# Altium PCB ADS805.PcbDoc
Units mm, origin at the board's own origin, x right, y up, seen from the top; angles counter-clockwise.
Board outline 78.23 x 53.34 mm, 2 copper layers (Top Layer, Bottom Layer); 53 components, 42 nets, 202 pads, 51 vias.
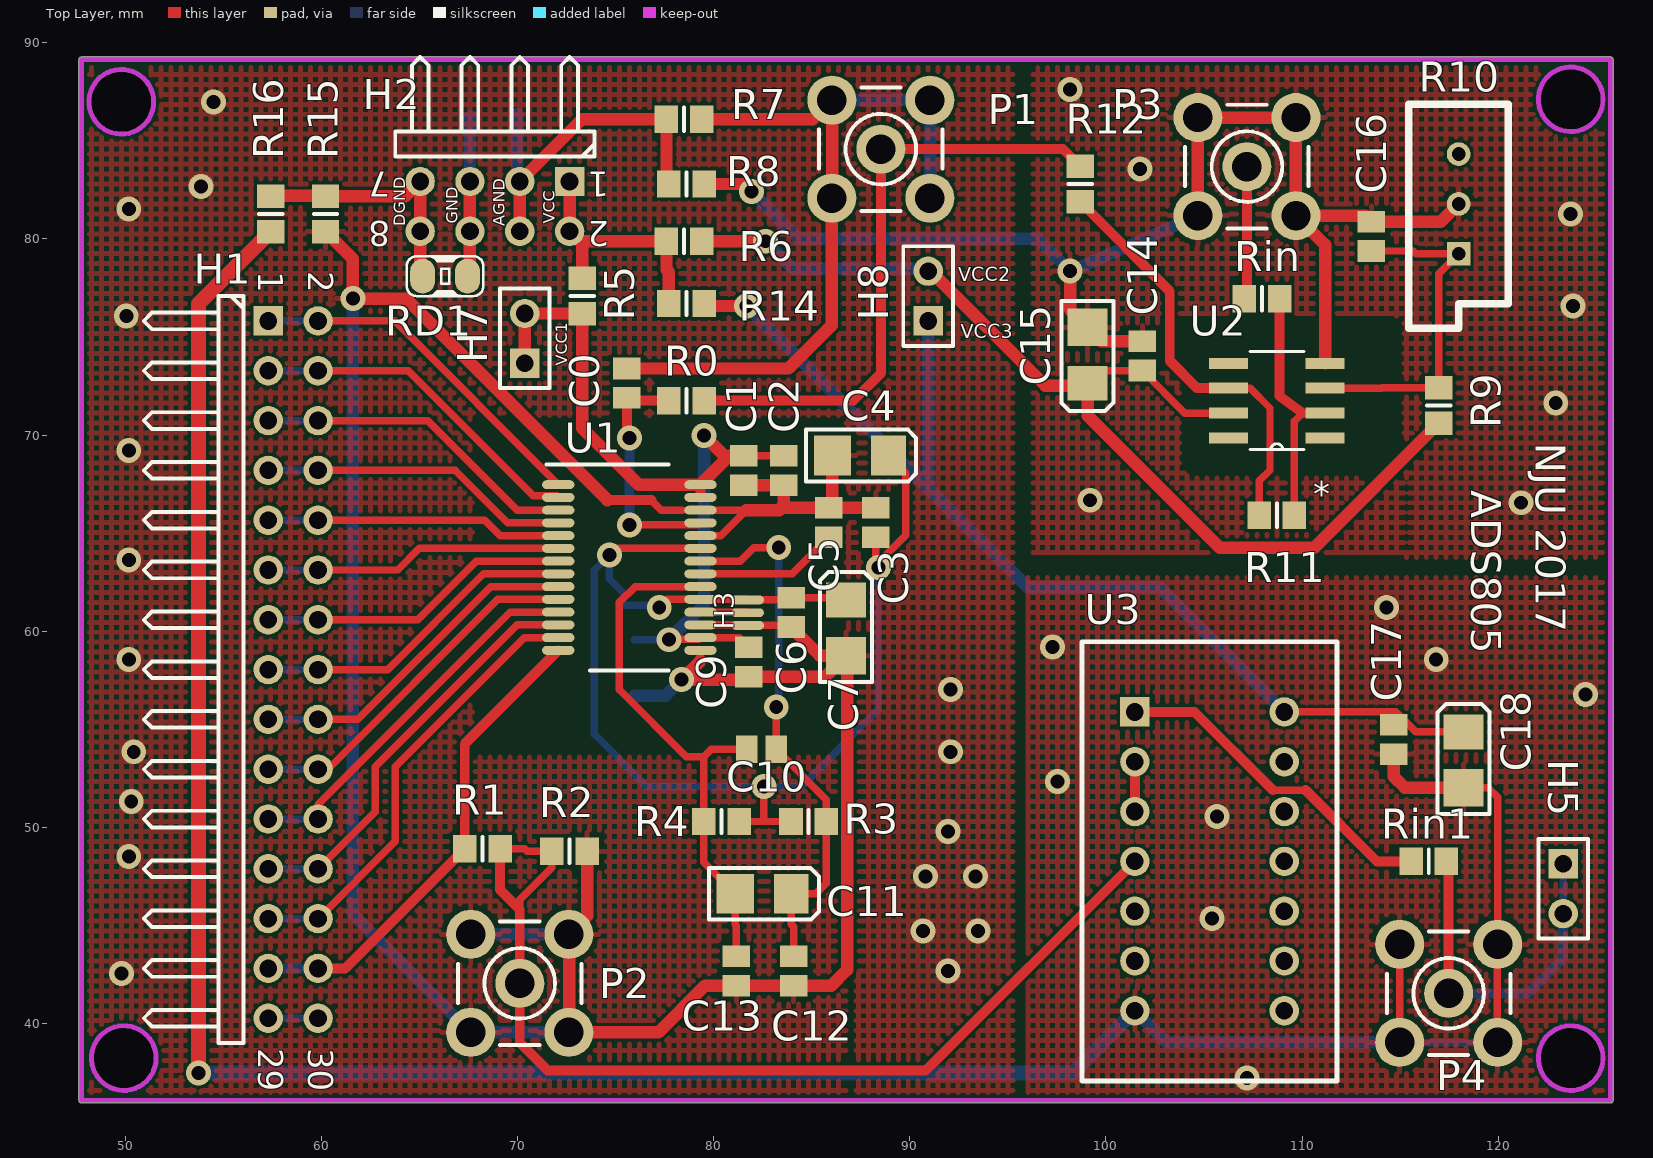
[diagram p0: Top Layer view]
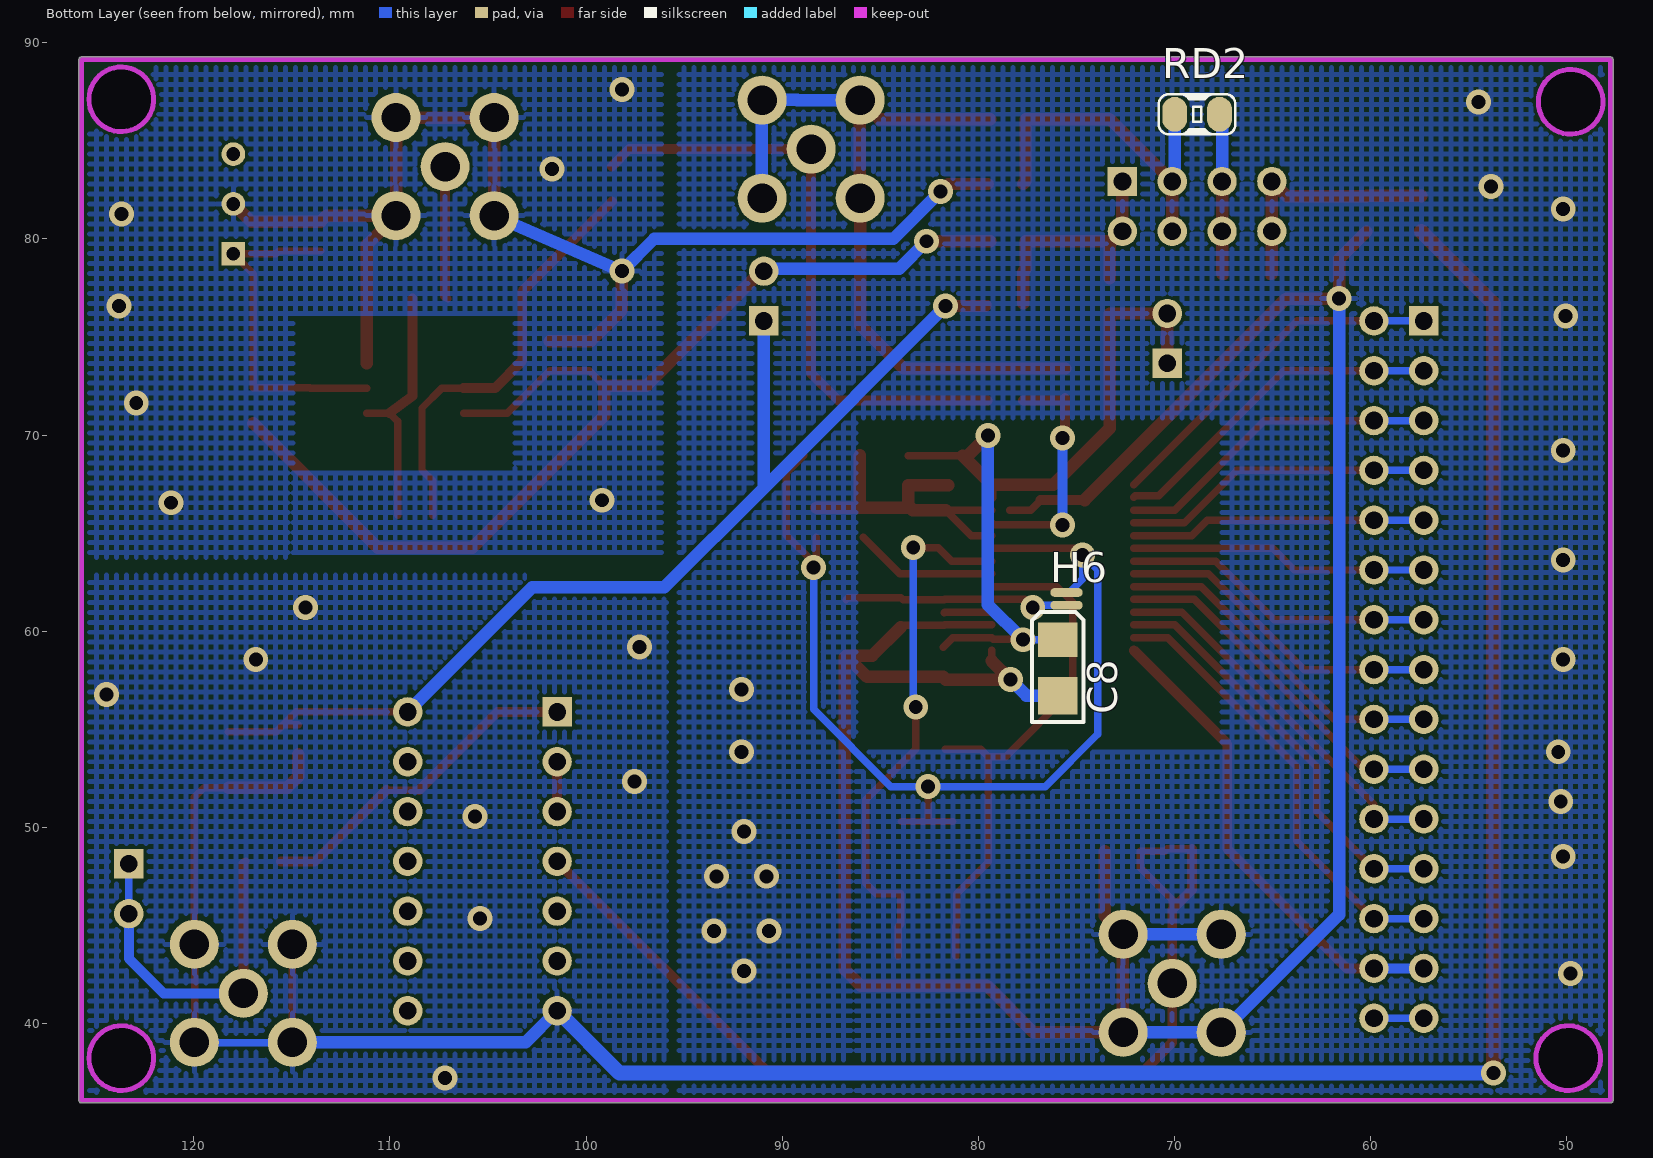
[diagram p1: Bottom Layer view, seen from below]

## Layer stack, top to bottom
Top Solder: solder mask 0.0102, Solder Resist, Dk 3.5
Top Layer: signal copper 0.0356
Dielectric 1: dielectric 0.32, FR-4, Dk 4.8
Bottom Layer: signal copper 0.0356
Bottom Solder: solder mask 0.0102, Solder Resist, Dk 3.5

## Board outline
47.625,36.068 47.625,89.154 cw(c47.752,89.154) 47.752,89.281 125.73,89.281 cw(c125.73,89.154) 125.857,89.154 125.857,36.068 cw(c125.73,36.068) 125.666,35.958 cw(c125.603,36.068) 125.603,35.941 47.752,35.941 cw(c47.752,36.068)

## Design rules (kind name [scope] priority, off if disabled: settings)
Clearance Clearance_1 [All] p1: gap=0.15
Clearance [All] p2: gap=0.254
PolygonConnect [All] p1: connectstyle=Relief reliefconductorwidth=0.254 reliefentries=4 polygonreliefangle="90 Angle" airgapwidth=0.254
RoutingVias [All] p1: holewidth=0.711 width=1.27 viastyle="Through Hole" minholewidth=0.711 minwidth=1.27 maxholewidth=0.711 maxwidth=1.27
SolderMaskExpansion [All] p1: expansion=0.102
Width SGND [InNet('SGND')] p1: maxlimit=1.016 minlimit=0.254 preferedwidth=0.635 minimp=50.000000 maximp=50.000000 favimp=50.000000
Width Width_1 [InNet('NetC17_2')] p2: maxlimit=0.762 minlimit=0.254 preferedwidth=0.635 minimp=50.000000 maximp=50.000000 favimp=50.000000
Width LH [InNetClass('LH')] p3: maxlimit=0.762 minlimit=0.508 preferedwidth=0.635 minimp=50.000000 maximp=50.000000 favimp=50.000000
Width GND2 [InNet('GND2')] p4: maxlimit=0.762 minlimit=0.254 preferedwidth=0.635 minimp=50.000000 maximp=50.000000 favimp=50.000000
Width VCC [InNetClass('VCC')] p5: maxlimit=0.762 minlimit=0.381 preferedwidth=0.635 bottomlayer_minwidth=0.508 minimp=50.000000 maximp=50.000000 favimp=50.000000
Width DGND [InNetClass('DGND')] p6: maxlimit=0.762 minlimit=0.254 preferedwidth=0.635 minimp=50.000000 maximp=50.000000 favimp=50.000000
Width AGND [InNet('AGND1')] p7: maxlimit=0.762 minlimit=0.508 preferedwidth=0.635 minimp=50.000000 maximp=50.000000 favimp=50.000000
Width DataBits [InNetClass('DataBits')] p8: maxlimit=0.381 minlimit=0.254 preferedwidth=0.381 minimp=50.000000 maximp=50.000000 favimp=50.000000
Width [All] p9: maxlimit=0.635 minlimit=0.254 preferedwidth=0.381 minimp=50.000000 maximp=50.000000 favimp=50.000000
30 further rules are at their usual default settings.

## Classes and differential pairs
net class DGND: DGND1
component class ADS803_schematic: C0 C1 C2 C3 C4 C5 C6 C7 C8 C9 C10 C11 C12 C13 C14 C15 C16 C17 C18 H1 H2 H3 P1 P2 P3 P4 R0 R1 R2 R3 R4 R5 R6 R7 R8 R9 R10 R11 R12 R14 R15 R16 Rin Rin1 U1 U2 U3

## Components (designator, comment, footprint, x,y, rotation, side; value= is the part's Value field where it differs from the comment)
C0 "100pF" C0805 75.565,72.644 r270 top
C1 "0.1uF" C0805 81.534,68.199 r270 top
C2 "0.1uF" C0805 83.566,68.199 r270 top
C3 "0.1uF" C0805 88.265,65.532 r90 top
C4 "10uF" CAP_SMD_3216 88.9,68.961 r180 top
C5 "0.1uF" C0805 85.852,65.532 r90 top
C6 "0.1uF" C0805 83.947,60.96 r270 top
C7 "10uF" CAP_SMD_3216 86.741,61.595 r270 top
C8 "2.2uF" CAP_SMD_3216 75.946,59.563 r270 bottom
C9 "0.1uF" C0805 81.788,58.42 r270 top
C10 "0.1uF" C0805 82.423,53.975 r180 top
C11 "10uF" CAP_SMD_3216 83.947,46.609 r180 top
C12 "0.1uF" C0805 84.074,42.672 r90 top
C13 "0.1uF" C0805 81.153,42.672 r90 top
C14 "0.1uF" C0805 101.854,74.041 r270 top
C15 "10uF" CAP_SMD_3216 99.06,72.644 r90 top
C16 "0.1uF" C0805 113.538,80.137 r270 top
C17 "0.1uF" C0805 114.681,54.483 r90 top
C18 "10uF" CAP_SMD_3216 118.237,54.864 r270 top
H1 "Header15x2" HDR2X15H 57.277,75.819 r270 top
H2 "Header4x2" HDR2X4H 72.644,82.931 r180 top
H3 "Header 3" Pin3 81.788,60.96 r0 top
H5 "Comment" HDR1X2 123.317,48.133 r270 top
H6 "Comment" Pin2 75.438,61.595 r180 bottom
H7 "Comment" HDR1X2 70.358,73.66 r90 top
H8 "Comment" HDR1X2 90.932,75.819 r90 top
P1 "SMB" SMB_V-RJ45 88.519,84.582 r0 top
P2 "SMB" SMB_V-RJ45 70.104,42.037 r0 top
P3 "SMB" SMB_V-RJ45 107.188,83.693 r0 top
P4 "SMB" SMB_V-RJ45 117.475,41.529 r0 top
R0 "25Ohm" 6-0805_N 78.613,71.755 r180 top
R1 "50Ohm" 6-0805_N 68.199,48.895 r0 top
R2 "50Ohm" 6-0805_N 72.644,48.768 r180 top
R3 "2k" 6-0805_N 84.836,50.292 r180 top
R4 "2k" 6-0805_N 80.391,50.292 r180 top
R5 "0Ohm" 6-0805_N 73.279,77.089 r270 top
R6 "0Ohm" 6-0805_N 78.486,79.883 r180 top
R7 "0Ohm" 6-0805_N 78.486,86.106 r0 top
R8 "0Ohm" 6-0805_N 78.613,82.804 r180 top
R9 "25Ohm" 6-0805_N 116.967,71.501 r90 top
R10 "Res Adj2" PRS_POT 117.983,84.328 r270 top
R11 "Res2" 6-0805_N 108.712,65.913 r180 top
R12 "Res2" 6-0805_N 98.679,82.804 r270 top
R14 "0Ohm" 6-0805_N 78.613,76.708 r0 top
R15 "0Ohm" 6-0805_N 60.198,81.28 r90 top
R16 "0Ohm" 6-0805_N 57.404,81.28 r90 top
RD1 "Comment" 0805R 65.151,78.105 r0 top
RD2 "Comment" 0805R 69.977,86.36 r180 bottom
Rin "25Ohm" 6-0805_N 107.95,76.962 r0 top
Rin1 "25Ohm" 6-0805_N 116.459,48.26 r0 top
U1 "ADS803" DB0028A_N 75.692,63.246 r0 top
U2 "OPA691_D_8" D8 108.712,71.755 r180 top
U3 "74VHC04" DIP-P14 105.283,48.26 r0 top

## Footprints (in the part's own frame and the unit in brackets; to place one, negate y for a bottom-side part, rotate by r counter-clockwise, add the part's x,y. Pads: shape width x height; smd on the part's side, far side on the other; paste and mask are expansions set on the pad)
6-0805_N [mm] "Chip Resistor, Body 2.0x1.2mm, IPC Medium Density"
  rect 1.2x1.4 smd: 1(-0.9,0) 2(0.9,0)
  silkscreen extent 0,-0.6 0,0.6, body extent -1.07,-0.7 1.07,0.7, height 0.7
0805R [mil] "0805封装电阻"
  oval 50x70 smd: 1(0,0) 2(90,0)
  silkscreen extent -32,-40 122,40, body extent 3,-25 82,25, height 30
C0805 [mm] "Chip Capacitor, Body 2.0x1.3mm, IPC High Density"
  rect 1.1x1.4 smd: 1(-0.75,0) 2(0.75,0)
  body extent -1.1,-0.72 1.1,0.72, height 1.4
CAP_SMD_3216 [mil] "贴片钽电容，10uF"
  rect 70x80 smd: 1(0,0)
  rect 75x80 smd: 2(112.2,0)
  silkscreen extent -56,-52 165,52, body extent -11,-35 123,35, height 63
D8 [mil]
  rect 78x22 smd: 1(-97,75) 2(-97,25) 3(-97,-25) 4(-97,-75) 5(97,-75) 6(97,-25) 7(97,25) 8(97,75)
  silkscreen extent -54,-98 54,98, body extent -122,-99 122,99, height 69
DB0028A_N [mm]
  oval 1.65x0.45 smd paste+0 mask+0.051: 1(-3.625,4.225) 2(-3.625,3.575) 3(-3.625,2.925) 4(-3.625,2.275) 5(-3.625,1.625) 6(-3.625,0.975) 7(-3.625,0.325) 8(-3.625,-0.325) 9(-3.625,-0.975) 10(-3.625,-1.625) 11(-3.625,-2.275) 12(-3.625,-2.925) 13(-3.625,-3.575) 14(-3.625,-4.225) 15(3.625,-4.225) 16(3.625,-3.575) 17(3.625,-2.925) 18(3.625,-2.275) 19(3.625,-1.625) 20(3.625,-0.975) 21(3.625,-0.325) 22(3.625,0.325) 23(3.625,0.975) 24(3.625,1.625) 25(3.625,2.275) 26(3.625,2.925) 27(3.625,3.575) 28(3.625,4.225)
  silkscreen extent -4.22,-5.25 2,5.25, body extent 0,0 0.25,0.25, height 0.25
DIP-P14 [mm]
  rect 1.5x1.5 hole 0.9: 1(-3.81,7.62)
  round 1.5 hole 0.9: 2(-3.81,5.08) 3(-3.81,2.54) 4(-3.81,0) 5(-3.81,-2.54) 6(-3.81,-5.08) 7(-3.81,-7.62) 8(3.81,-7.62) 9(3.81,-5.08) 10(3.81,-2.54) 11(3.81,0) 12(3.81,2.54) 13(3.81,5.08) 14(3.81,7.62)
  silkscreen extent -6.5,-11.2 6.5,11.2
HDR1X2 [mm] "Connector; Header; 2 Position"
  rect 1.5x1.5 hole 0.9: 1(0,0)
  round 1.5 hole 0.9: 2(2.54,0)
  silkscreen extent -1.27,-1.27 3.81,1.27
HDR2X4H [mm] "Connector; Header; 4x2 Position; Right Angle"
  rect 1.5x1.5 hole 0.9: 1(0,0)
  round 1.5 hole 0.9: 2(0,2.54) 3(2.54,0) 4(2.54,2.54) 5(5.08,0) 6(5.08,2.54) 7(7.62,0) 8(7.62,2.54)
  silkscreen extent -1.27,-6.35 8.89,-1.27
HDR2X15H [mm] "Connector; Header; 15x2 Position; Right Angle"
  rect 1.5x1.5 hole 0.9: 1(0,0)
  round 1.5 hole 0.9: 2(0,2.54) 3(2.54,0) 4(2.54,2.54) 5(5.08,0) 6(5.08,2.54) 7(7.62,0) 8(7.62,2.54) 9(10.16,0) 10(10.16,2.54) 11(12.7,0) 12(12.7,2.54) 13(15.24,0) 14(15.24,2.54) 15(17.78,0) 16(17.78,2.54) 17(20.32,0) 18(20.32,2.54) 19(22.86,0) 20(22.86,2.54) 21(25.4,0) 22(25.4,2.54) 23(27.94,0) 24(27.94,2.54) 25(30.48,0) 26(30.48,2.54) 27(33.02,0) 28(33.02,2.54) 29(35.56,0) 30(35.56,2.54)
  silkscreen extent -1.27,-6.35 36.83,-1.27
Pin2 [mm]
  oval 1.65x0.45 smd paste+0 mask+0.051: 1(-0.058,0.377) 2(-0.058,-0.273)
Pin3 [mm]
  oval 1.65x0.45 smd paste+0 mask+0.051: 1(-0.058,0.631) 2(-0.058,-0.019) 3(-0.058,-0.669)
PRS_POT [mm] "电位器"
  rect 1.2x1.2 hole 0.7: 1(5.08,0)
  round 1.2 hole 0.7: 2(2.54,0) 3(0,0)
  silkscreen extent -2.54,-2.54 8.89,2.54, body extent -2.64,-2.64 7.52,2.64, height 10.5
SMB_V-RJ45 [mm] "Connector; SMB Straight"
  round 2.5 hole 1.5: 1(0,0) 2(-2.5,-2.5) 2(-2.5,2.5) 2(2.5,-2.5) 2(2.5,2.5)
  silkscreen extent -3.15,-3.15 3.15,3.15

## Part data
C0 C1 C2 C3 C5 C6 C9 C10 C12 C13 C14 C16 C17: library part Cap1
C4 C7 C8 C11 C15 C18: library part Cap2
H3: "Header, 3-Pin"
P1 P2 P3 P4: "SMB Straight Connector"
R0 R1 R2 R3 R4 R5 R6 R7 R8 R9 R14 R15 R16 Rin Rin1: library part RES1
R10: "Variable Resistor"
R11 R12: "Resistor"
U2: "Imported"
U3: "非门"

## Free pads (board coordinates)
  round 1.524 hole 3.1: 4(49.784,86.995) 5(123.698,87.122) 6(123.698,38.227) 7(49.911,38.227)

## Via types
v1: diameter 1.27, hole 0.711, Top Layer to Bottom Layer, 51 vias

## Nets (pads, with @x,y where several pads share a name; then routed paths per layer and width w, separated by ;. In a path a pad name is that pad's centre, name@x,y a point inside that pad or via, vN(x,y) a via of type N, cw(c..) or ccw(c..) an arc to the next point about the centre after c; other vN are vias at no path point)
ADIN: P1.1 R0.1 R12.1 | length 31.5
  Top Layer w0.508: R0.1 87.122,71.755 88.519,73.152 P1.1 97.801,84.582 R12.1
AGND1: C0.1 P1.2 R7.2 | length 39.9
  Top Layer w0.635: C0.1 83.808,73.394 86.019,75.605 86.019,82.082 86.03,82.093 86.03,87.071 86.019,87.082 85.043,86.106 R7.2
  Bottom Layer w0.635: P1.2@86.019,87.082 89.216,87.082 89.23,87.097 91.004,87.097 91.019,87.082 91.034,87.067 91.034,82.097 P1.2@91.019,82.082
CLK1: P2.1 R1.2 R2.2 U3.4 | length 53
  Top Layer w0.381: R1.2 70.358,48.895 70.485,48.768 R2.2 71.744,47.944 70.104,46.304 70.104,45.807
  Top Layer w0.508: R1.2 69.099,46.812 70.104,45.807 P2.1 70.104,39.014 71.526,37.592 90.805,37.592 U3.4
DGND1: C17.1 C18.2 P4.2 R16.1 U3.7 | length 137.1
  Top Layer w0.381: P4.2@114.975,39.029 114.986,39.04 114.986,44.018 P4.2@114.975,44.029 ; C18.2 119.482,52.014 119.975,51.521 119.975,44.029 119.964,44.018 119.964,39.04 P4.2@119.975,39.029
  Top Layer w0.635: C17.1 114.681,52.573 115.24,52.014 C18.2
  Top Layer w0.762: v1(53.721,37.465) 53.721,76.697 R16.1
  Bottom Layer w0.381: P4.2@114.975,39.029 114.99,39.014 119.96,39.014 P4.2@119.975,39.029
  Bottom Layer w0.635: U3.7 103.084,39.029 P4.2@114.975,39.029
  Bottom Layer w0.762: v1(53.721,37.465) 98.298,37.465 U3.7
  other v1: 107.188,37.211 105.41,45.339 105.664,50.546 97.536,52.324 124.46,56.769 116.84,58.547 97.282,59.182 114.3,61.214
GND: H2.5 H2.6 RD1.2 RD2.2 | length 8.4
  Top Layer w0.381: RD1.2 RD1.2@67.564,78.232
  Top Layer w0.635: RD1.2@67.564,78.232 H2.6 H2.5
  Bottom Layer w0.381: RD2.2@67.564,86.233 RD2.2
  Bottom Layer w0.635: H2.5 RD2.2@67.564,86.233
GND2: C14.1 C15.2 C16.1 P3.2 R8.1 R10.2 U2.4 | length 65.9
  Top Layer w0.635: R8.1 81.534,82.804 v1(81.915,82.423) ; v1(98.171,78.359) 98.171,76.383 C15.2 99.763,74.791 C14.1 ; P3.2@104.688,81.193 104.688,86.193 109.688,86.193 P3.2@109.688,81.193 ; U2.4 111.176,79.705 P3.2@109.688,81.193 ; R10.2 117.082,80.887 C16.1 113.232,81.193 P3.2@109.688,81.193
  Bottom Layer w0.635: v1(81.915,82.423) 84.328,80.01 96.52,80.01 v1(98.171,78.359) P3.2@104.688,81.193
  other v1: 121.158,66.548 99.187,66.675 122.936,71.628 123.825,76.581 123.698,81.28 101.727,83.566 98.171,87.63
L1: H1.1 H1.2 U1.1 | length 18.2
  Top Layer w0.381: H1.2 63.719,75.819 U1.1
  Bottom Layer w0.381: H1.1 H1.2
L2: H1.3 H1.4 U1.2 | length 17.5
  Top Layer w0.381: H1.4 64.421,73.279 70.795,66.905 71.983,66.905 U1.2
  Bottom Layer w0.381: H1.3 H1.4
L3: H1.5 H1.6 U1.3 | length 16.7
  Top Layer w0.381: H1.6 65.405,70.739 69.973,66.171 U1.3
  Bottom Layer w0.381: H1.5 H1.6
L4: H1.7 H1.8 U1.4 | length 15.9
  Top Layer w0.381: H1.8 66.802,68.199 69.48,65.521 U1.4
  Bottom Layer w0.381: H1.7 H1.8
L5: H1.9 H1.10 U1.5 | length 15.1
  Top Layer w0.381: H1.10 68.326,65.659 69.114,64.871 U1.5
  Bottom Layer w0.381: H1.9 H1.10
L6: H1.11 H1.12 U1.6 | length 15.2
  Top Layer w0.381: H1.12 63.881,63.119 64.983,64.221 U1.6
  Bottom Layer w0.381: H1.11 H1.12
L7: H1.13 H1.14 U1.7 | length 16
  Top Layer w0.381: H1.14 64.897,60.579 67.889,63.571 U1.7
  Bottom Layer w0.381: H1.13 H1.14
L8: H1.15 H1.16 U1.8 | length 16.8
  Top Layer w0.381: H1.16 63.373,58.039 68.255,62.921 U1.8
  Bottom Layer w0.381: H1.15 H1.16
L9: H1.17 H1.18 U1.9 | length 17.6
  Top Layer w0.381: H1.18 61.849,55.499 68.621,62.271 U1.9
  Bottom Layer w0.381: H1.17 H1.18
L10: H1.19 H1.20 U1.10 | length 18.4
  Top Layer w0.381: H1.20 60.325,52.959 68.987,61.621 U1.10
  Bottom Layer w0.381: H1.19 H1.20
L11: H1.21 H1.22 U1.11 | length 19.6
  Top Layer w0.381: H1.22 59.817,51.181 69.607,60.971 U1.11
  Bottom Layer w0.381: H1.21 H1.22
L12: H1.23 H1.24 U1.12 | length 21.3
  Top Layer w0.381: H1.24 62.738,50.8 62.738,53.086 69.973,60.321 U1.12
  Bottom Layer w0.381: H1.23 H1.24
L13: H1.25 H1.26 U1.13 | length 23
  Top Layer w0.381: H1.26 63.754,49.276 63.754,53.086 70.339,59.671 U1.13
  Bottom Layer w0.381: H1.25 H1.26
L14: H1.27 H1.28 R1.1 U1.14 | length 24.6
  Top Layer w0.508: H1.28 61.203,42.799 R1.1 67.299,54.253 U1.14
  Bottom Layer w0.508: H1.27 H1.28
L15: H1.29 H1.30 | length 2.5
  Bottom Layer w0.381: H1.29 H1.30
LH1: H2.1 H2.2 R5.1 R6.2 R14.1 | length 12.9
  Top Layer w0.635: H2.1 H2.2 H2.2@73.152,79.883 ; R5.1 73.279,79.756 H2.2@73.152,79.883 ; R14.1 77.713,78.308 77.586,78.435 R6.2 H2.2@73.152,79.883
LH2: H2.3 H2.4 R7.1 R8.2 RD2.1 | length 18.2
  Top Layer w0.635: H2.4 H2.3 73.279,86.106 R7.1 77.586,82.931 R8.2
  Bottom Layer w0.381: H2.3@69.977,83.058 H2.3
  Bottom Layer w0.635: H2.3@69.977,83.058 RD2.1
LH4: H2.7 H2.8 R15.2 R16.2 RD1.1 | length 12.8
  Top Layer w0.381: RD1.1@65.024,78.232 RD1.1
  Top Layer w0.635: R16.2 57.404,82.194 60.198,82.194 R15.2 64.273,82.18 H2.7 H2.8 RD1.1@65.024,78.232
NetC0_2: C0.2 R0.2 U1.25 | length 12.2
  Top Layer w0.381: v1@75.565,69.977 v1(75.692,69.85) ; v1(75.692,65.405) 75.723,65.436 79.232,65.436 U1.25 ; C0.2@75.692,71.767 C0.2@75.704,71.755
  Top Layer w0.508: v1@75.565,69.977 C0.2 ; C0.2@75.704,71.755 R0.2
  Bottom Layer w0.508: v1(75.692,65.405) v1(75.692,69.85)
NetC3_1: C3.1 C4.1 H6.1 R3.2 R4.1 U1.23 | length 53.4
  Top Layer w0.381: v1(74.676,63.881) 75.016,64.221 U1.23 ; R4.1 82.423,50.292 ; v1(82.55,52.07) 82.55,50.419 82.423,50.292 ; R3.2 82.423,50.292 ; C3.1 88.265,63.373 89.789,64.897 89.789,68.072 C4.1
  Bottom Layer w0.381: H6.1@75.369,61.972 74.676,62.665 v1(74.676,63.881) 73.914,63.119 73.914,54.737 76.581,52.07 v1(82.55,52.07) 84.455,52.07 88.392,56.007 v1(88.392,63.246)
NetC5_1: C5.1 U1.21 | length 7.3
  Top Layer w0.381: U1.21 83.991,62.921 C5.1
NetC10_1: C10.1 C11.1 C12.2 R3.1 U1.22 | length 27.8
  Top Layer w0.381: U1.22 81.351,63.571 82.042,64.262 v1(83.312,64.262) ; v1(83.185,56.134) 83.173,56.122 C10.1 85.736,51.412 R3.1 85.736,47.142 85.203,46.609 C11.1 83.947,45.06 84.074,44.933 C12.2
  Bottom Layer w0.381: v1(83.185,56.134) 83.312,56.261 v1(83.312,64.262)
NetC10_2: C10.2 C11.2 C13.2 R4.2 U1.20 | length 27.8
  Top Layer w0.381: U1.20 75.987,62.271 75.184,61.468 75.184,57.023 78.602,53.605 79.491,53.605 ; C13.2 81.153,44.983 81.097,45.039 C11.2 79.491,48.215 R4.2 79.491,53.605 ; C10.2 79.861,53.975 79.491,53.605
NetC16_2: C16.2 R9.2 R10.1 U2.3 | length 17.6
  Top Layer w0.381: U2.3 114.071,72.39 114.082,72.401 R9.2 116.967,78.232 R10.1 115.811,79.248 115.672,79.387 C16.2
NetC17_2: C17.2 C18.1 H8.1 R14.2 U3.14 | length 57
  Top Layer w0.381: R14.2 R14.2@79.64,76.581 ; U3.14 114.783,55.88 115.43,55.233 ; C17.2 115.43,55.233 ; C18.1 115.799,54.864 115.43,55.233
  Top Layer w0.635: R14.2@79.64,76.581 v1(81.661,76.581)
  Bottom Layer w0.635: v1(81.661,76.581) 90.932,67.31 ; H8.1 90.932,67.31 ; U3.14 102.743,62.23 96.012,62.23 90.932,67.31
NetP3_1: P3.1 Rin.1 | length 6.8
  Top Layer w0.381: Rin.1 Rin.1@107.188,77.1
  Top Layer w0.508: Rin.1@107.188,77.1 P3.1
NetP4_1: H5.1 H5.2 P4.1 Rin1.2 | length 18.2
  Top Layer w0.381: Rin1.2 Rin1.2@117.475,48.144
  Top Layer w0.508: P4.1 Rin1.2@117.475,48.144
  Bottom Layer w0.381: H5.2 H5.1
  Bottom Layer w0.508: P4.1 121.539,41.529 123.317,43.307 H5.2
NetR11_1: R11.1 Rin.2 U2.2 | length 13
  Top Layer w0.381: R11.1 109.612,70.714 110.018,71.12 U2.2
  Top Layer w0.508: Rin.2 108.85,71.998 110.018,71.12
NetR11_2: R11.2 R12.2 U2.6 | length 21.8
  Top Layer w0.381: U2.6 107.355,72.39 108.364,71.38 108.364,68.214 107.812,67.662 R11.2
  Top Layer w0.508: R12.2 103.251,77.332 103.251,73.787 104.648,72.39 U2.6
NetRin1_1: Rin1.1 U3.1 | length 17.2
  Top Layer w0.381: 108.511,51.89 110.183,51.89
  Top Layer w0.508: U3.1 104.521,55.88 108.511,51.89 ; 110.183,51.89 113.814,48.26 Rin1.1
NetU3_2: U3.2 U3.3 | length 2.5
  Top Layer w0.508: U3.3 U3.2
SEL: H3.2 U1.18 | length 2.4
  Top Layer w0.381: U1.18 81.7,60.971 H3.2
SGND: C1.2 C2.2 C3.2 C4.2 C5.2 C6.2 C7.2 C8.2 C9.2 C12.1 C13.1 H3.3 P2.2 R2.1 R15.1 U1.15 U1.17 U1.24 U1.26 | length 155.8
  Top Layer w0.381: 76.813,66.686 77.328,66.171 78.388,66.171 ; 79.317,58.489 U1.15 ; U1.17 81.7,60.321 H3.3 C6.2@83.947,60.291 ; U1.24 80.361,64.871 81.661,66.171 U1.26
  Top Layer w0.508: 74.571,66.686 76.813,66.686
  Top Layer w0.635: R15.1 61.595,78.983 v1(61.595,76.962) 64.295,76.962 74.571,66.686 ; P2.2@72.604,39.537 P2.2@72.619,39.537 ; R2.1 73.544,45.477 72.604,44.537 72.619,44.522 P2.2@72.619,39.537 ; 79.317,58.489 v1(78.359,57.531) 81.649,57.531 C9.2 85.666,57.67 C7.2 ; C1.2 C2.2 83.566,66.409 83.439,66.282 ; 81.661,66.171 83.328,66.171 83.439,66.282 ; C6.2 85.412,58.745 C7.2 ; C4.2 86.05,66.48 C5.2 ; C3.2 C5.2 ; P2.2@72.619,39.537 77.168,39.537 79.553,41.922 C13.1 C12.1 85.991,41.922 86.804,42.735 86.804,58.682 C7.2 ; 83.439,66.282 C5.2
  Bottom Layer w0.635: v1(61.595,76.962) 61.595,45.546 67.604,39.537 67.615,39.548 72.593,39.548 P2.2@72.604,39.537 ; P2.2@67.604,44.537 P2.2@72.604,44.537 ; C8.2 77.541,56.713 v1(78.359,57.531)
  other v1: 49.784,42.545 91.948,42.672 90.678,44.704 93.472,44.704 90.805,47.498 93.345,47.498 50.165,48.514 91.948,49.784 50.292,51.308 50.419,53.848 92.075,53.848 92.075,57.023 50.165,58.547 50.165,63.627 50.165,69.215 50.038,76.073 50.165,81.534 53.848,82.677 54.483,86.995
VCC1: C1.1 C2.1 C8.1 C9.1 H7.1 H7.2 R5.2 U1.16 U1.27 U1.28 | length 43
  Top Layer w0.381: R5.2@73.268,76.2 R5.2 ; v1(77.724,59.563) 77.748,59.587 79.232,59.587 U1.16 81.287,59.671 C9.1 ; 80.53,68.949 80.795,68.949 C1.1 C2.1
  Top Layer w0.508: U1.27 U1.28
  Top Layer w0.635: H7.1 H7.2 R5.2@73.268,76.2 ; R5.2 73.279,70.358 76.166,67.471 U1.28 80.795,68.949 ; v1(79.502,69.977) 80.53,68.949
  Bottom Layer w0.381: C8.1 v1(77.724,59.563)
  Bottom Layer w0.635: v1(77.724,59.563) 79.502,61.341 v1(79.502,69.977)
VCC3: C14.2 C15.1 H8.2 R6.1 R9.1 U2.7 | length 55.9
  Top Layer w0.381: C15.1@99.06,72.517 99.834,73.291 C14.2 104.025,71.12 U2.7
  Top Layer w0.635: R6.1 v1(82.626,79.883) ; H8.2@91.123,78.295 96.901,72.517 99.06,72.517 99.06,70.993 105.791,64.262 110.628,64.262 R9.1
  Bottom Layer w0.635: v1(82.626,79.883) 84.023,78.486 H8.2@91.123,78.486
VREF: C6.1 C7.1 H3.1 H6.2 U1.19 | length 11.7
  Top Layer w0.381: v1(77.216,61.214) 77.623,61.621 U1.19 81.7,61.621 H3.1 83.828,61.591 C6.1 86.626,61.71 C7.1
  Bottom Layer w0.381: H6.2@75.369,61.322 77.108,61.322 v1(77.216,61.214)
pads on no net: R10.3 U2.1 U2.5 U2.8 U3.5 U3.6 U3.8 U3.9 U3.10 U3.11 U3.12 U3.13

## Polygon pours and split planes (outlines as drawn)
SGND on Top Layer "SGND" (hatched 90Degree grid 0.508 track 0.254, pour order 24): 47.752,89.154 95.25,89.154 95.25,36.068 86.741,36.068 86.741,70.739 86.868,70.866 86.741,70.993 67.691,70.993 67.691,53.721 67.564,53.594 87.249,53.594 87.249,36.322 87.503,36.068 47.752,36.068
DGND1 on Top Layer "GND2" (hatched 90Degree grid 0.508 track 0.254, pour order 14): 96.012,62.738 125.73,62.738 125.73,36.449 125.349,36.068 96.012,36.068
GND2 on Top Layer "GND2" (hatched 90Degree grid 0.508 track 0.254, pour order 2): 96.393,89.154 125.476,89.154 125.476,63.754 115.189,63.754 115.189,75.692 114.681,76.2 103.759,76.2 103.759,68.326 104.013,68.072 104.267,67.818 115.443,67.818 115.443,63.881 115.316,64.008 96.266,64.008 96.266,89.027 96.393,89.154
SGND on Bottom Layer "SGND" (hatched 90Degree grid 0.508 track 0.254, pour order 26): 47.752,89.154 95.123,89.154 95.25,89.027 95.25,36.068 86.233,36.068 86.233,70.866 67.818,70.866 67.564,70.612 67.564,53.848 86.487,53.848 86.614,53.721 86.487,53.594 86.487,36.068 47.752,36.068
DGND1 on Bottom Layer "GND2" (hatched 90Degree grid 0.508 track 0.254, pour order 10): 96.139,62.865 125.603,62.865 125.603,36.068 95.885,36.068 95.885,62.738 96.012,62.865
GND2 on Bottom Layer "GND2" (hatched 90Degree grid 0.508 track 0.254, pour order 4): 96.393,89.154 125.73,89.154 125.73,63.5 125.476,63.754 114.935,63.754 114.935,76.073 114.808,76.2 103.632,76.2 103.632,68.326 103.759,68.199 103.886,68.072 115.189,68.072 115.189,64.008 115.443,63.754 115.189,64.008 96.139,64.008 96.139,89.027 96.266,89.154

## Keep-outs
Keep-Out Layer:
  circle w0.254: c123.698,87.122 r1.65
  circle w0.254: c123.698,38.227 r1.65
  circle w0.254: c49.911,38.227 r1.65
  circle w0.254: c49.784,86.995 r1.65
  lines w0.254: 125.603,36.068 52.705,36.068 47.752,36.068 47.752,89.154 125.73,89.154 125.73,36.068

## Silkscreen, mask and mechanical layers (free items; w line width, h text height)
Top Overlay:
  text "GND" at 66.929,80.772 h0.6 r90
  text "VCC" at 71.882,80.772 h0.6 r90
  text "DGND" at 64.262,80.645 h0.6 r90
  text "AGND" at 69.342,80.645 h0.6 r90
  text "VCC2" at 92.456,77.851 h0.7
  text "VCC3" at 92.583,74.93 h0.7
  text "VCC1" at 72.517,73.533 h0.6 r90
  text "NJU 2017" at 121.92,69.596 h1.52 r270
  text "ADS805" at 118.618,67.183 h1.52 r270

## Text inside footprints (layer, text, board x,y; h text height)
H1: Top Overlay "30" at 59.309,38.735 h1.27 r270; Top Overlay "29" at 56.769,38.735 h1.27 r270; Top Overlay "1" at 56.769,78.359 h1.27 r270; Top Overlay "2" at 59.309,78.359 h1.27 r270
H2: Top Overlay "8" at 63.5,80.899 h1.27 r180; Top Overlay "7" at 63.5,83.439 h1.27 r180; Top Overlay "1" at 74.676,83.439 h1.27 r180; Top Overlay "2" at 74.676,80.899 h1.27 r180
U2: Top Overlay "*" at 111.43,68.148 h1.27 r180; Mechanical 13 "*" at 111.43,68.148 h1.27 r180